# Altium PCB ain.PcbDoc
Units mm, origin at the board's own origin, x right, y up, seen from the top; angles counter-clockwise.
Board outline 152.4 x 101.6 mm, 2 copper layers (Top Layer, Bottom Layer); 52 components, 66 nets, 184 pads, 0 vias.
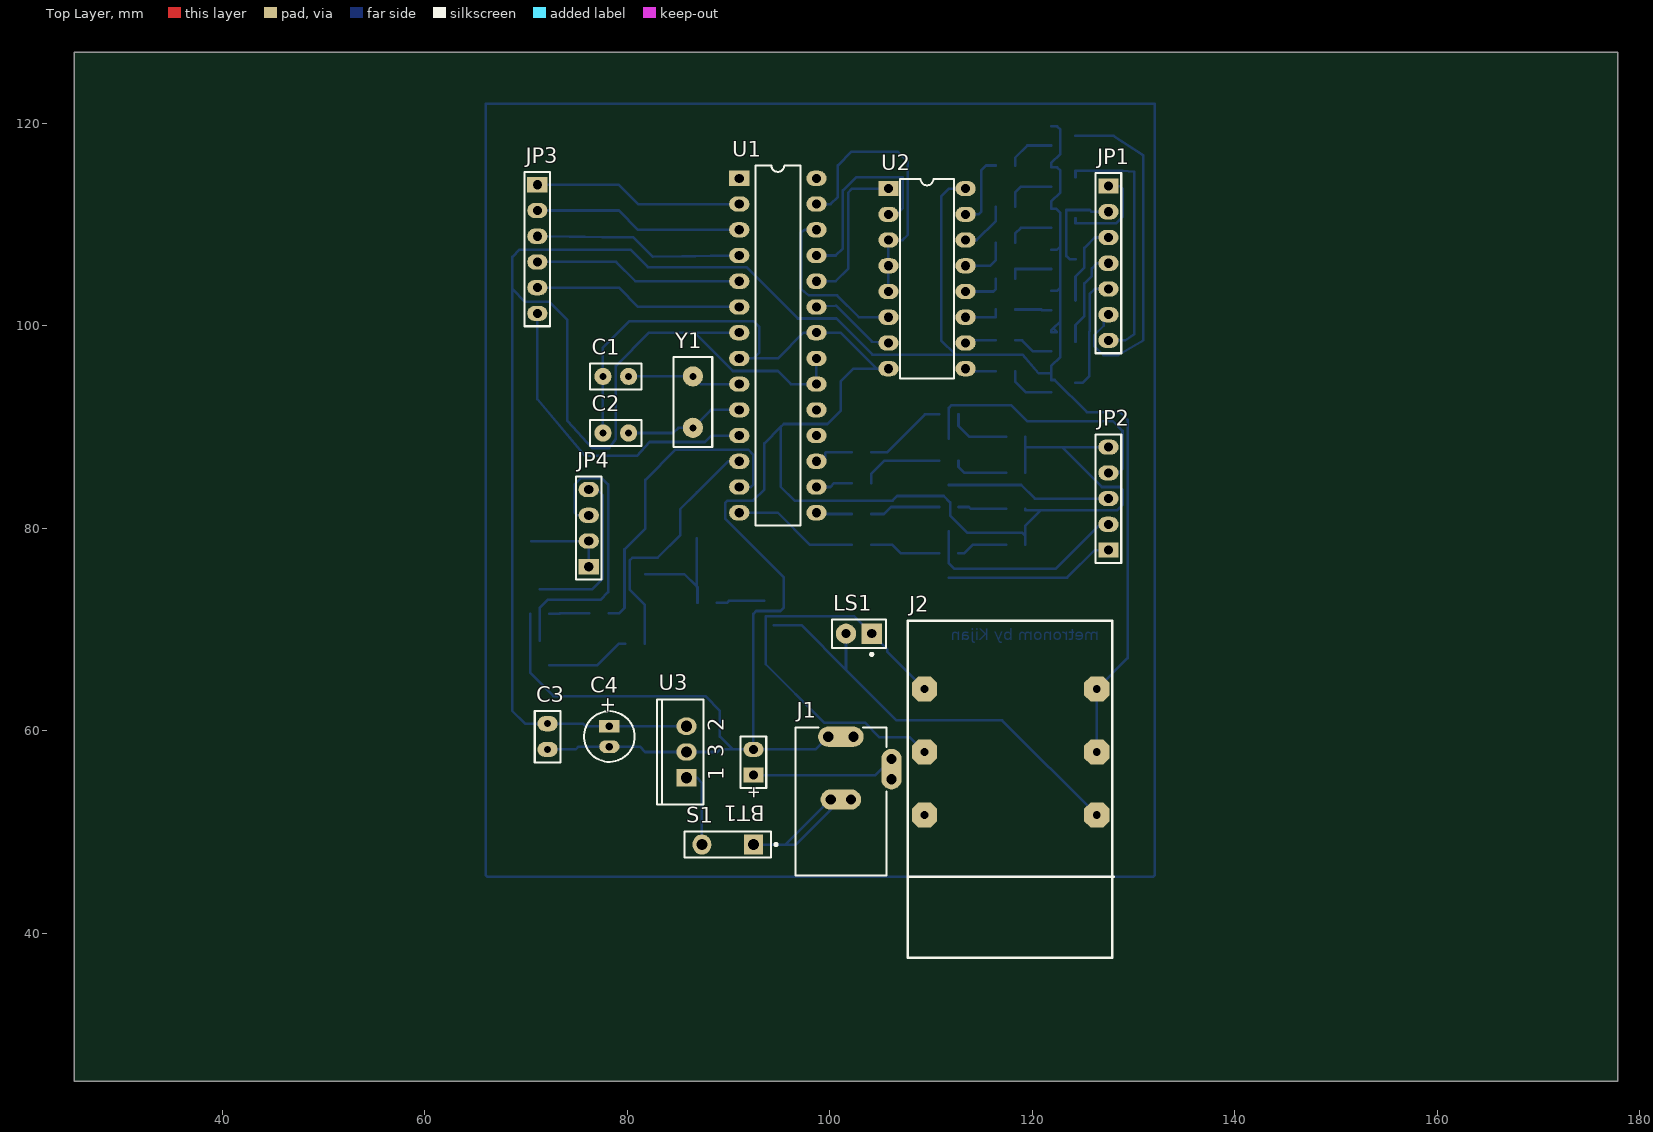
[diagram p0: Top Layer view]
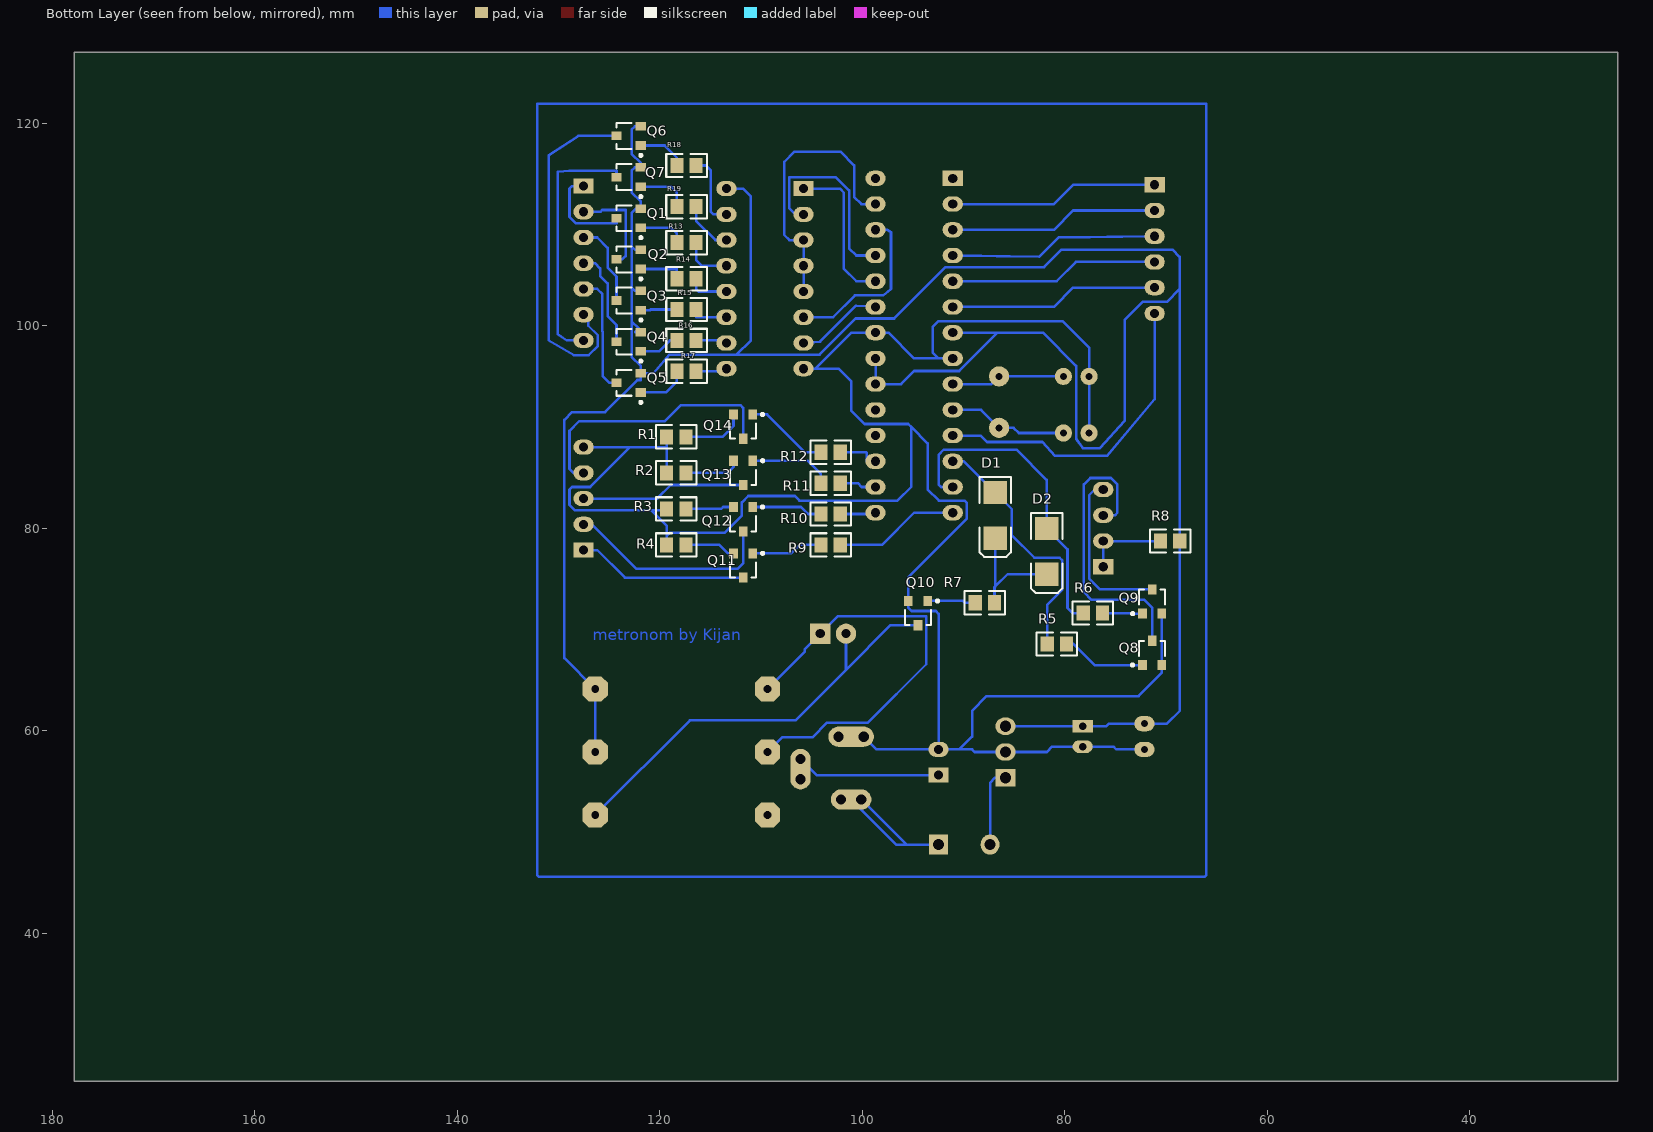
[diagram p1: Bottom Layer view, seen from below]

## Layer stack, top to bottom
Top Layer: signal copper 0.0356
Dielectric: dielectric 0.32, FR-4, Dk 4.8
Bottom Layer: signal copper 0.0356

## Board outline
25.4,25.4 177.8,25.4 177.8,127 25.4,127

## Design rules (kind name [scope] priority, off if disabled: settings)
Clearance [All] p1: gap=0.254
ComponentClearance [All] p1: gap=0.254 collisioncheckmode=0
PolygonConnect [All] p1: connectstyle=Relief reliefconductorwidth=0.254 reliefentries=4 polygonreliefangle="90 Angle"
RoutingLayers [All] p1: top layer="Not Used" bottom layer=Vertical
RoutingVias [All] p1: holewidth=0.711 width=1.27 viastyle="Through Hole" minholewidth=0.711 minwidth=1.27 maxholewidth=0.711 maxwidth=1.27
SolderMaskExpansion [All] p1: expansion=0.102
TestPointUsage [All] p1: valid=0 allowmultiple=FALSE
Testpoint [All] p1: side=15 testpointundercomponent=TRUE minsize=1.016 maxsize=2.54 preferedsize=1.524 minholesize=0 maxholesize=1.016 preferedholesize=0.813 testpointgrid=0.025 style=1023 order=1234567890
Width [All] p1: maxlimit=0.254 minlimit=0.254 preferedwidth=0.254
16 further rules are at their usual default settings.

## Components (designator, comment, footprint, x,y, rotation, side; value= is the part's Value field where it differs from the comment)
BT1 "9V" BAT-2 92.456,56.896 r90 top
C1 "Cap" RAD-0.1#1 78.867,94.996 r0 top
C2 "Cap" RAD-0.1#1 78.867,89.408 r0 top
C3 "Cap" RAD-0.1#2 72.136,59.436 r90 top
C4 "Cap Pol1" CAPPR2-5X6.8 78.232,59.436 r270 top
D1 "Diode" DSO-C2/X2.3 86.868,81.28 r270 bottom
D2 "Diode" DSO-C2/X2.3 81.788,77.724 r270 bottom
J1 "MIN 7V" KLD-0202 101.092,45.72 r90 top
J2 "Phonejack Stereo SW" "Stereo b-jack" 117.856,57.912 r270 top
JP1 "Header 7" HDR1X7 127.508,113.792 r270 top
JP2 "Header 5" HDR1X5 127.508,77.851 r90 top
JP3 "Header 6" HDR1X6 71.12,113.919 r270 top
JP4 "Header 4" HDR1X4 76.2,76.2 r90 top
LS1 "Speaker" PIN2 104.14,69.596 r180 top
Q1 "BC807" SOT23 123.063,110.617 r90 bottom
Q2 "BC807" SOT23 123.063,106.553 r90 bottom
Q3 "BC807" SOT23 123.063,102.489 r90 bottom
Q4 "BC807" SOT23 123.063,98.425 r90 bottom
Q5 "BC807" SOT23 123.063,94.361 r90 bottom
Q6 "BC807" SOT23 123.063,118.745 r90 bottom
Q7 "BC807" SOT23 123.063,114.681 r90 bottom
Q8 "BC817" SOT23 71.374,67.691 r180 bottom
Q9 "BC817" SOT23 71.374,72.771 r180 bottom
Q10 "BC817" SOT23 94.488,71.628 r0 bottom
Q11 "BC817" SOT23 111.76,76.327 r0 bottom
Q12 "BC817" SOT23 111.76,80.899 r0 bottom
Q13 "BC817" SOT23 111.76,85.471 r0 bottom
Q14 "BC817" SOT23 111.76,90.043 r0 bottom
R1 "Res1" CR2012-0805 118.364,89.027 r180 bottom
R2 "Res1" CR2012-0805 118.364,85.471 r180 bottom
R3 "Res1" CR2012-0805 118.364,81.915 r180 bottom
R4 "Res1" CR2012-0805 118.364,78.359 r180 bottom
R5 "Res1" CR2012-0805 80.772,68.58 r180 bottom
R6 "Res1" CR2012-0805 77.216,71.628 r180 bottom
R7 "Res1" CR2012-0805 87.884,72.644 r0 bottom
R8 "Res1" CR2012-0805 69.596,78.74 r180 bottom
R9 "Res1" CR2012-0805 103.124,78.359 r180 bottom
R10 "Res1" CR2012-0805 103.124,81.407 r180 bottom
R11 "Res1" CR2012-0805 103.124,84.455 r180 bottom
R12 "Res1" CR2012-0805 103.124,87.503 r180 bottom
R13 "Res1" CR2012-0805 117.348,108.204 r0 bottom
R14 "Res1" CR2012-0805 117.348,104.648 r0 bottom
R15 "Res1" CR2012-0805 117.348,101.6 r0 bottom
R16 "Res1" CR2012-0805 117.348,98.552 r0 bottom
R17 "Res1" CR2012-0805 117.348,95.504 r0 bottom
R18 "Res1" CR2012-0805 117.348,115.824 r0 bottom
R19 "Res1" CR2012-0805 117.348,111.76 r0 bottom
S1 "wl¹cznik" SPST-2 89.916,48.768 r180 top
U1 "ATmega8-16PI" 28P3 94.869,98.044 r270 top
U2 "SN74LS47N" N016 109.601,104.648 r270 top
U3 "L78S05CV" TO220VW 85.852,57.912 r90 top
Y1 "8MHz" RAD-0.2 86.487,92.456 r270 top

## Footprints (in the part's own frame and the unit in brackets; to place one, negate y for a bottom-side part, rotate by r counter-clockwise, add the part's x,y. Pads: shape width x height; smd on the part's side, far side on the other; paste and mask are expansions set on the pad)
28P3 [mm] "DIP; 28 Leads; Row Spacing 7.62 mm; Pitch 2.54 mm"
  rect 1.5x2 hole 0.9: 1(-16.51,-3.81)
  oval 1.5x2 hole 0.9: 2(-13.97,-3.81) 3(-11.43,-3.81) 4(-8.89,-3.81) 5(-6.35,-3.81) 6(-3.81,-3.81) 7(-1.27,-3.81) 8(1.27,-3.81) 9(3.81,-3.81) 10(6.35,-3.81) 11(8.89,-3.81) 12(11.43,-3.81) 13(13.97,-3.81) 14(16.51,-3.81) 15(16.51,3.81) 16(13.97,3.81) 17(11.43,3.81) 18(8.89,3.81) 19(6.35,3.81) 20(3.81,3.81) 21(1.27,3.81) 22(-1.27,3.81) 23(-3.81,3.81) 24(-6.35,3.81) 25(-8.89,3.81) 26(-11.43,3.81) 27(-13.97,3.81) 28(-16.51,3.81)
  silkscreen extent -17.78,-2.22 17.78,2.22
BAT-2 [mm]
  rect 1.5x2 hole 0.9: 1(-1.27,0)
  oval 1.5x2 hole 0.9: 2(1.27,0)
  silkscreen extent -2.54,-1.27 2.54,1.27
CAPPR2-5X6.8 [mm]
  rect 1.25x2 hole 0.75: 1(-1,0)
  oval 1.25x2 hole 0.75: 2(1,0)
  silkscreen extent -2.5,-2.5 2.5,2.5
CR2012-0805 [mm]
  rect 1.3x1.5 smd: 1(-0.95,0) 2(0.95,0)
  silkscreen extent -2,-1.15 2,1.15
DSO-C2/X2.3 [mm]
  rect 2.3x2.3 smd: 1(-2.25,0) 2(2.25,0)
  silkscreen extent -3.8,-1.55 4.1,1.55
HDR1X4 [mm] "Connector; Header; 4 Position"
  rect 1.5x2 hole 0.9: 1(0,0)
  oval 1.5x2 hole 0.9: 2(2.54,0) 3(5.08,0) 4(7.62,0)
  silkscreen extent -1.27,-1.27 8.89,1.27
HDR1X5 [mm] "Connector; Header; 5 Position"
  rect 1.5x2 hole 0.9: 1(0,0)
  oval 1.5x2 hole 0.9: 2(2.54,0) 3(5.08,0) 4(7.62,0) 5(10.16,0)
  silkscreen extent -1.27,-1.27 11.43,1.27
HDR1X6 [mm] "Connector; Header; 6 Position"
  rect 1.5x2 hole 0.9: 1(0,0)
  oval 1.5x2 hole 0.9: 2(2.54,0) 3(5.08,0) 4(7.62,0) 5(10.16,0) 6(12.7,0)
  silkscreen extent -1.27,-1.27 13.97,1.27
HDR1X7 [mm] "Connector; Header; 7 Position"
  rect 1.5x2 hole 0.9: 1(0,0)
  oval 1.5x2 hole 0.9: 2(2.54,0) 3(5.08,0) 4(7.62,0) 5(10.16,0) 6(12.7,0) 7(15.24,0)
  silkscreen extent -1.27,-1.27 16.51,1.27
KLD-0202 [mm] "DC Power Jack, 2.5mm, KLD Series, PCB Mount"
  oval 2x4.5 all layers, no hole: 1(13.7,0)
  round 1.5 hole 1: 1A(13.7,-1.25) 1B(13.7,1.25) 2A(7.5,-1) 2B(7.5,1) 3A(9.5,-5) 3B(11.5,-5)
  oval 2x4 all layers, no hole: 2(7.5,0)
  oval 4x2 all layers, no hole: 3(10.5,-5)
  silkscreen extent 0,-4.5 14.6,4.5
N016 [mm] "DIP; 16 Leads; Row Spacing 7.62 mm; Pitch 2.54 mm"
  rect 1.5x2 hole 0.9: 1(-8.89,-3.81)
  oval 1.5x2 hole 0.9: 2(-6.35,-3.81) 3(-3.81,-3.81) 4(-1.27,-3.81) 5(1.27,-3.81) 6(3.81,-3.81) 7(6.35,-3.81) 8(8.89,-3.81) 9(8.89,3.81) 10(6.35,3.81) 11(3.81,3.81) 12(1.27,3.81) 13(-1.27,3.81) 14(-3.81,3.81) 15(-6.35,3.81) 16(-8.89,3.81)
  silkscreen extent -9.85,-2.65 9.85,2.65
PIN2 [mm]
  rect 2x2 hole 0.9: 1(0,0)
  round 2 hole 0.9: 2(2.54,0)
  silkscreen extent -1.4,-1.4 3.94,2.17
RAD-0.1#1 [mm]
  round 1.7 hole 0.7: 1(-1.27,0) 2(1.27,0)
  silkscreen extent -2.54,-1.27 2.54,1.27
RAD-0.1#2 [mm]
  oval 1.5x2 hole 0.7: 1(-1.27,0) 2(1.27,0)
  silkscreen extent -2.54,-1.27 2.54,1.27
RAD-0.2 [mm]
  round 2 hole 0.7: 1(-2.54,0) 2(2.54,0)
  silkscreen extent -4.44,-1.91 4.44,1.91
SOT23 [mm] "SOT-23; 3 Leads; Body 3.0 x 2.5 mm, inc. leads (LxW max)"
  rect 0.85x1 smd: 1(-0.95,-1.2) 2(0.95,-1.2) 3(0,1.2)
  silkscreen extent -2.05,-1.32 1.28,1.2
SPST-2 [mm]
  rect 1.85x2 hole 1.1: 1(-2.54,0)
  oval 1.85x2 hole 1.1: 2(2.54,0)
  silkscreen extent -4.89,-1.27 4.28,1.27
"Stereo b-jack" [mil]
  oct 98.43x98.43 hole 30: G0(245,335) G1(245,-335) L0(-245,335) L1(-245,-335) R0(0,335) R2(0,-335)
  silkscreen extent -510,-400 800,400
TO220VW [mm] "TO, Thru-Hole, Vertical, Heatsink Mounted; 3 In-Line Leads; Pitch 2.54 mm; Pin sequence 1, 3, 2"
  rect 1.7x2 hole 1.1: 1(-2.54,0)
  oval 1.7x2 hole 1.1: 2(2.54,0) 3(0,0)
  silkscreen extent -5.2,-1.7 5.2,2.9

## Part data
BT1: library part Battery, "Multicell Battery"
C1 C2 C3: "Capacitor"
C4: "Polarized Capacitor (Radial)"
D1 D2: "Default Diode"
J1: library part PWR2.5, "Low Voltage Power Supply Connector"
J2: "3-Conductor Jack with 2 break contacts (normals) and 2 auxiliary make contacts"
JP1: "Header, 7-Pin"
JP2: "Header, 5-Pin"
JP3: "Header, 6-Pin"
JP4: "Header, 4-Pin"
LS1: "Loudspeaker"
Q1 Q2 Q3 Q4 Q5 Q6 Q7: "PNP General-purpose Transistor"
Q8 Q9 Q10 Q11 Q12 Q13 Q14: "NPN General-purpose Transistor"
R1 R2 R3 R4 R5 R6 R7 R8 R9 R10 R11 R12 R13 R14 R15 R16 R17 R18 R19: "Resistor"
S1: library part SW-SPST, "Single-Pole, Single-Throw Switch"
U1: "8-Bit AVR Microcontroller with 8K Bytes of In-System Programmable Flash Memory"
U2: "BCD-to-Seven-Segment Decoder/Driver"
U3: "2A Positive Voltage Regulator"
Y1: library part XTAL, "Crystal Oscillator"

## Nets (pads, with @x,y where several pads share a name; then routed paths per layer and width w, separated by ;. In a path a pad name is that pad's centre, name@x,y a point inside that pad or via, vN(x,y) a via of type N, cw(c..) or ccw(c..) an arc to the next point about the centre after c; other vN are vias at no path point)
GND: BT1.2 C1.1 C2.1 C3.1 C4.2 J1.1 J1.1A J1.1B JP2.5 Q8.2 Q9.2 Q10.2 R1.1 R2.1 R3.1 R4.1 U1.8 U1.22 U2.8 U3.3 | length 229.8
  Bottom Layer w0.254: Q9.2 70.424,67.208 70.409,67.193 70.409,66.491 Q8.2 70.424,65.72 72.72,63.424 87.706,63.424 89.154,61.976 89.154,59.436 90.424,58.166 ; C3.1 74.914,58.166 75.184,58.436 C4.2 81.239,58.436 81.763,57.912 U3.3 88.9,57.912 89.154,58.166 90.424,58.166 ; C2.1 C1.1 77.597,97.841 80.213,100.457 92.456,100.457 93.04,99.873 93.04,97.358 92.456,96.774 ; U1.8 92.456,96.774 ; J1.1A J1.1 J1.1B 98.588,58.166 BT1.2 ; U2.8 104.623,95.758 ; R4.1 119.314,79.248 ; R3.1 119.314,81.788 120.838,81.788 ; R2.1 119.314,88.011 ; R1.1 119.314,88.011 ; JP2.5 122.936,88.011 ; 90.424,58.166 BT1.2 ; BT1.2 92.456,71.552 92.735,71.831 95.133,71.831 95.438,72.136 Q10.2 95.438,75.184 89.662,80.96 89.662,82.474 89.916,82.728 92.431,82.728 93.548,83.845 93.548,88.392 95.148,89.992 ; 92.456,96.774 94.869,96.774 97.409,99.314 U1.22 101.067,99.314 104.623,95.758 ; 95.148,89.992 95.453,90.297 99.771,90.297 101.067,91.592 101.067,94.488 102.337,95.758 104.623,95.758 ; 95.148,89.992 95.148,84.099 96.52,82.728 106.197,82.728 106.655,83.185 111.252,83.185 111.887,82.55 111.887,81.28 113.614,79.553 119.009,79.553 119.314,79.248 ; 119.314,79.248 119.314,80.264 120.838,81.788 ; 119.314,88.011 122.936,88.011 ; 120.838,81.788 128.397,81.788 128.905,82.296 128.905,83.82 128.651,84.074 126.873,84.074 122.936,88.011
NetBT1_1: BT1.1 J1.3 J1.3A J1.3B | length 17.9
  Bottom Layer w0.254: BT1.1 104.498,55.626 J1.3@105.41,56.538 ; J1.3A J1.3A@105.686,55.626 ; J1.3@105.41,56.538 105.592,56.72 J1.3B J1.3 106.092,55.626 J1.3A@105.686,55.626 ; J1.3@105.41,56.538 105.41,56.22 105.41,55.902 105.592,55.72 J1.3A@105.686,55.626
NetC1_2: C1.2 U1.9 Y1.1 | length 11.2
  Bottom Layer w0.254: C1.2 Y1.1 87.249,94.234 U1.9
NetC2_2: C2.2 U1.10 Y1.2 | length 11.9
  Bottom Layer w0.254: C2.2 84.531,89.408 85.039,89.916 Y1.2 88.265,91.694 U1.10
NetD1_1: D1.1 R5.1 U1.12 | length 25.2
  Bottom Layer w0.254: R5.1 81.722,72.456 80.239,73.939 80.239,76.81 80.518,77.089 83.007,77.089 85.217,79.299 85.217,81.879 D1.1 89.952,86.614 U1.12
NetD1_2: D1.2 D2.2 R7.1 | length 12
  Bottom Layer w0.254: D2.2 85.628,75.474 86.868,74.234 ; D1.2 86.868,74.234 ; R7.1 86.934,74.168 86.868,74.234
NetD2_1: D2.1 R6.1 U1.13 | length 31.8
  Bottom Layer w0.254: R6.1 79.223,71.628 79.731,72.136 79.731,77.917 D2.1 81.788,84.785 84.76,87.757 91.948,87.757 92.456,87.249 92.456,84.328 92.202,84.074 U1.13
NetJ1_2: J1.2 J1.2A J1.2B S1.1 | length 18.8
  Bottom Layer w0.254: S1.1 95.64,48.768 ; J1.2A 102.074,53.238 101.092,53.238 J1.2@101.083,53.229 ; 95.64,48.768 96.64,48.768 100.592,52.72 J1.2 J1.2@101.083,53.229 ; 95.64,48.768 J1.2B 100.11,53.238 101.074,53.238 J1.2@101.083,53.229
NetJ2_1: J2.G0 LS1.2 Q10.3 | length 43.2
  Bottom Layer w0.254: Q10.3 97.187,70.428 101.6,66.015 ; LS1.2 101.6,66.015 ; J2.G0 117.018,61.036 106.578,61.036 101.6,66.015
NetJ2_3: J2.L1 J2.R2 LS1.1 | length 42.8
  Bottom Layer w0.254: J2.R2 107.899,59.36 104.927,59.36 103.48,60.808 99.441,60.808 93.675,66.573 93.675,71.323 102.413,71.323 LS1.1 105.664,68.072 105.664,67.818 J2.L1
NetJP1_1: JP1.1 Q1.3 | length 9.7
  Bottom Layer w0.254: Q1.3 124.263,110.109 128.27,110.109 128.905,110.744 128.905,113.538 128.651,113.792 JP1.1
NetJP1_2: JP1.2 Q2.3 | length 9.8
  Bottom Layer w0.254: Q2.3 123.698,106.553 123.368,106.883 123.368,111.43 125.679,111.43 125.857,111.252 JP1.2
NetJP1_3: JP1.3 Q3.3 | length 8.4
  Bottom Layer w0.254: Q3.3 124.263,104.857 125.146,105.74 125.146,107.696 126.162,108.712 JP1.3
NetJP1_4: JP1.4 Q4.3 | length 9.7
  Bottom Layer w0.254: Q4.3 124.263,100.076 125.146,100.959 125.146,104.191 125.882,104.927 125.882,105.664 126.39,106.172 JP1.4
NetJP1_5: JP1.5 Q5.3 | length 11.8
  Bottom Layer w0.254: Q5.3 124.968,94.361 125.603,94.996 125.603,99.39 125.654,99.441 125.654,103.124 126.162,103.632 JP1.5
NetJP1_6: JP1.6 Q6.3 | length 35.1
  Bottom Layer w0.254: Q6.3 128.016,118.745 130.937,116.84 130.937,98.552 128.473,97.104 127,97.104 126.111,97.993 126.111,99.06 127.051,100 127.051,101.092 JP1.6
NetJP1_7: JP1.7 Q7.3 | length 25.2
  Bottom Layer w0.254: Q7.3 124.263,115.316 128.905,115.316 130.048,115.189 130.048,99.162 129.184,98.552 JP1.7
NetJP2_1: JP2.1 Q11.3 | length 16.9
  Bottom Layer w0.254: Q11.3 123.438,75.127 126.162,77.851 JP2.1
NetJP2_2: JP2.2 Q12.3 | length 20.9
  Bottom Layer w0.254: Q12.3 111.76,76.53 112.268,76.022 122.326,76.022 126.695,80.391 JP2.2
NetJP2_3: JP2.3 Q13.3 | length 16.3
  Bottom Layer w0.254: Q13.3 118.904,84.271 120.244,82.931 JP2.3
NetJP2_4: JP2.4 Q14.3 | length 26.7
  Bottom Layer w0.254: Q14.3 111.76,91.897 112.014,92.151 117.907,92.151 119.482,90.576 127.94,90.576 128.905,89.611 128.905,85.852 128.524,85.471 JP2.4
NetJP3_1: JP3.1 U1.2 | length 20.7
  Bottom Layer w0.254: JP3.1 79.172,113.919 81.077,112.014 U1.2
NetJP3_2: JP3.2 U1.3 | length 20.7
  Bottom Layer w0.254: JP3.2 79.172,111.379 81.077,109.474 U1.3
NetJP3_3: JP3.3 U1.4 | length 20.7
  Bottom Layer w0.254: JP3.3 80.62,108.712 82.525,106.807 U1.4
NetJP3_4: JP3.4 U1.5 | length 20.7
  Bottom Layer w0.254: JP3.4 78.892,106.299 80.797,104.394 U1.5
NetJP3_5: JP3.5 U1.6 | length 20.7
  Bottom Layer w0.254: JP3.5 79.172,103.759 81.077,101.854 U1.6
NetJP3_6: JP3.6 U1.11 | length 31.9
  Bottom Layer w0.254: JP3.6 71.12,92.735 75.819,87.147 80.975,87.147 82.22,88.519 87.681,88.519 88.316,89.154 U1.11
NetJP4_1: JP4.1 JP4.2 R8.1 | length 8.2
  Bottom Layer w0.254: R8.1 JP4.2 JP4.1
NetJP4_3: JP4.3 Q8.3 | length 29.4
  Bottom Layer w0.254: Q8.3 71.374,72.161 72.136,72.923 77.343,72.923 78.105,73.685 78.105,84.328 77.47,84.963 75.438,84.963 74.803,84.328 74.803,81.534 75.057,81.28 JP4.3
NetJP4_4: JP4.4 Q9.3 | length 16.5
  Bottom Layer w0.254: Q9.3 76.511,73.971 77.597,75.057 77.597,83.261 77.038,83.82 JP4.4
NetQ1_1: Q1.1 R13.2 | length 4.7
  Bottom Layer w0.254: R13.2 118.298,109.093 118.872,109.667 Q1.1
NetQ2_1: Q2.1 R14.2 | length 4.5
  Bottom Layer w0.254: R14.2 118.298,105.603 Q2.1
NetQ3_1: Q3.1 R15.2 | length 3.6
  Bottom Layer w0.254: R15.2 120.879,101.6 120.94,101.539 Q3.1
NetQ4_1: Q4.1 R16.2 | length 4
  Bottom Layer w0.254: R16.2 118.989,98.552 120.066,97.475 Q4.1
NetQ5_1: Q5.1 R17.2 | length 5
  Bottom Layer w0.254: R17.2 118.298,94.488 119.375,93.411 Q5.1
NetQ6_1: Q6.1 R18.2 | length 4.8
  Bottom Layer w0.254: R18.2 118.298,116.586 119.507,117.795 Q6.1
NetQ7_1: Q7.1 R19.2 | length 5.2
  Bottom Layer w0.254: R19.2 118.298,113.157 118.872,113.731 Q7.1
NetQ8_1: Q8.1 R5.2 | length 8.4
  Bottom Layer w0.254: Q8.1 77.057,66.491 79.146,68.58 R5.2
NetQ9_1: Q9.1 R6.2 | length 4
  Bottom Layer w0.254: Q9.1 73.324,71.571 73.381,71.628 R6.2
NetQ10_1: Q10.1 R7.2 | length 4.8
  Bottom Layer w0.254: R7.2 89.859,72.644 90.043,72.828 Q10.1
NetQ11_1: Q11.1 R9.1 | length 7.1
  Bottom Layer w0.254: R9.1 106.178,78.359 107.01,77.527 Q11.1
NetQ11_2: Q11.2 R4.2 | length 5
  Bottom Layer w0.254: Q11.2 113.265,77.527 114.097,78.359 R4.2
NetQ12_1: Q12.1 R10.1 | length 7
  Bottom Layer w0.254: R10.1 105.353,81.407 106.045,82.099 Q12.1
NetQ12_2: Q12.2 R3.2 | length 4.8
  Bottom Layer w0.254: Q12.2 113.735,82.099 113.919,81.915 R3.2
NetQ13_1: Q13.1 R11.1 | length 8.2
  Bottom Layer w0.254: R11.1 104.074,85.344 105.401,86.671 Q13.1
NetQ13_2: Q13.2 R2.2 | length 5.6
  Bottom Layer w0.254: Q13.2 112.71,86.07 113.309,85.471 R2.2
NetQ14_1: Q14.1 R12.1 | length 8.3
  Bottom Layer w0.254: R12.1 105.664,87.503 109.404,91.243 Q14.1
NetQ14_2: Q14.2 R1.2 | length 6.3
  Bottom Layer w0.254: Q14.2 112.71,90.109 113.792,89.027 R1.2
NetR9_2: R9.2 U1.14 | length 12.4
  Bottom Layer w0.254: U1.14 94.869,81.534 98.044,78.359 R9.2
NetR10_2: R10.2 U1.15 | length 3.6
  Bottom Layer w0.254: U1.15 98.933,81.534 98.933,81.407 R10.2
NetR11_2: R11.2 U1.16 | length 3.7
  Bottom Layer w0.254: U1.16 100.051,84.074 100.432,84.455 R11.2
NetR12_2: R12.2 U1.17 | length 4.4
  Bottom Layer w0.254: U1.17 99.568,86.614 99.568,87.452 99.619,87.503 R12.2
NetR13_1: R13.1 U2.13 | length 4.9
  Bottom Layer w0.254: U2.13 115.824,105.918 116.398,106.492 R13.1
NetR14_1: R14.1 U2.12 | length 4.1
  Bottom Layer w0.254: U2.12 116.144,103.378 116.398,103.632 R14.1
NetR15_1: R15.1 U2.11 | length 3.7
  Bottom Layer w0.254: U2.11 116.398,100.838 R15.1
NetR16_1: R16.1 U2.10 | length 3.2
  Bottom Layer w0.254: U2.10 113.665,98.298 113.665,98.552 R16.1
NetR17_1: R17.1 U2.9 | length 3.2
  Bottom Layer w0.254: U2.9 113.665,95.758 113.665,95.504 R17.1
NetR18_1: R18.1 U2.15 | length 7.4
  Bottom Layer w0.254: U2.15 114.681,110.998 114.935,111.252 114.935,115.316 115.443,115.824 R18.1
NetR19_1: R19.1 U2.14 | length 5.2
  Bottom Layer w0.254: U2.14 114.503,108.458 116.398,110.353 R19.1
NetS1_2: S1.2 U3.1 | length 7.8
  Bottom Layer w0.254: U3.1 86.868,55.372 87.376,54.864 S1.2
NetU1_23: U1.23 U2.7 | length 8.6
  Bottom Layer w0.254: U1.23 100.609,101.981 104.165,98.425 U2.7
NetU1_24: U1.24 U2.1 | length 15.3
  Bottom Layer w0.254: U1.24 100.584,104.394 101.803,105.613 101.803,113.132 102.21,113.538 U2.1
NetU1_25: U1.25 U2.2 | length 19.8
  Bottom Layer w0.254: U1.25 100.584,106.934 101.295,107.645 101.295,113.36 102.616,114.681 107.188,114.681 107.188,111.582 106.604,110.998 U2.2
NetU1_26: U1.26 U2.6 | length 16.9
  Bottom Layer w0.254: U1.26 97.536,109.474 97.155,109.22 97.155,103.632 97.917,102.997 100.711,102.997 102.87,100.838 U2.6
NetU1_27: U1.27 U2.3 U2.4 U2.5 | length 27.8
  Bottom Layer w0.254: U1.27 100.076,112.014 100.787,112.725 100.787,115.824 102.159,117.196 106.68,117.196 107.696,116.18 107.696,108.966 107.188,108.458 U2.3 U2.4 U2.5
VCC: C3.2 C4.1 J2.L0 J2.R0 Q1.2 Q2.2 Q3.2 Q4.2 Q5.2 Q6.2 Q7.2 R8.2 U1.7 U1.20 U1.21 U2.16 U3.2 | length 286.7
  Bottom Layer w0.254: U3.2 82.017,60.452 82.001,60.436 C4.1 75.911,60.436 75.641,60.706 C3.2 69.916,60.706 68.646,61.976 R8.2 68.646,106.797 68.656,106.797 ; U1.7 86.639,99.314 ; U1.21 U1.20 96.164,94.234 94.869,95.529 90.424,95.529 86.639,99.314 ; U2.16 111.76,113.538 110.998,112.776 110.998,98.552 112.395,97.155 ; Q3.2 122.428,103.439 122.758,103.769 ; Q2.2 122.428,107.503 122.758,107.833 ; Q6.2 122.443,119.695 122.758,119.38 122.758,116.973 121.863,116.078 Q7.2 122.443,115.631 122.758,115.316 122.758,113.157 121.863,112.262 Q1.2 122.326,111.567 122.758,111.135 122.758,107.833 ; J2.R0 J2.L0 129.413,67.183 129.413,90.703 128.651,91.465 125.374,91.465 122.199,94.64 121.863,94.64 Q5.2 ; 68.656,106.797 68.656,103.632 69.926,102.362 72.314,102.362 74.092,100.584 74.092,90.602 76.53,87.909 78.207,87.909 78.867,88.824 78.867,96.037 82.144,99.314 86.639,99.314 ; 68.656,106.797 68.656,106.807 69.367,107.518 80.315,107.518 82.042,105.791 91.77,105.791 96.85,100.711 100.66,100.711 104.216,97.155 112.395,97.155 ; 112.395,97.155 112.649,97.155 119.024,97.155 ; 112.395,97.155 118.77,97.155 119.024,97.155 ; 119.024,97.155 120.614,95.311 Q5.2 ; Q5.2 121.863,96.006 122.758,96.901 122.758,100.438 ; Q4.2@122.062,99.741 122.146,99.658 122.428,99.375 Q4.2 121.863,99.543 Q4.2@122.062,99.741 ; Q4.2@122.062,99.741 122.758,100.438 ; 122.758,100.438 122.758,103.769 ; 122.758,103.769 122.758,107.833
pads on no net: J2.G1 U1.1 U1.18 U1.19 U1.28
copper on no net: | length 305.3
  Bottom Layer w0.254: 107.188,45.593 131.953,45.593 132.08,45.72 132.08,121.92 66.04,121.92 66.04,45.72 66.167,45.593 127.889,45.593

## Other copper
Bottom Layer:
  text "metronom by Kijan" at 126.619,68.961 h1.1

## Text inside footprints (layer, text, board x,y; h text height)
BT1: Top Overlay "+" at 93.033,53.226 h1.15 r90
C4: Top Overlay "+" at 77.482,63.411 h1.5 r270
U3: Top Overlay "1" at 89.527,55.122 h1.5 r90; Top Overlay "2" at 89.527,59.952 h1.5 r90; Top Overlay "3" at 89.527,57.412 h1.5 r90